# EAGLE board microzed_breakout_v0.7-default.78060e59 (EAGLE 7.7.0), part 1 of 2
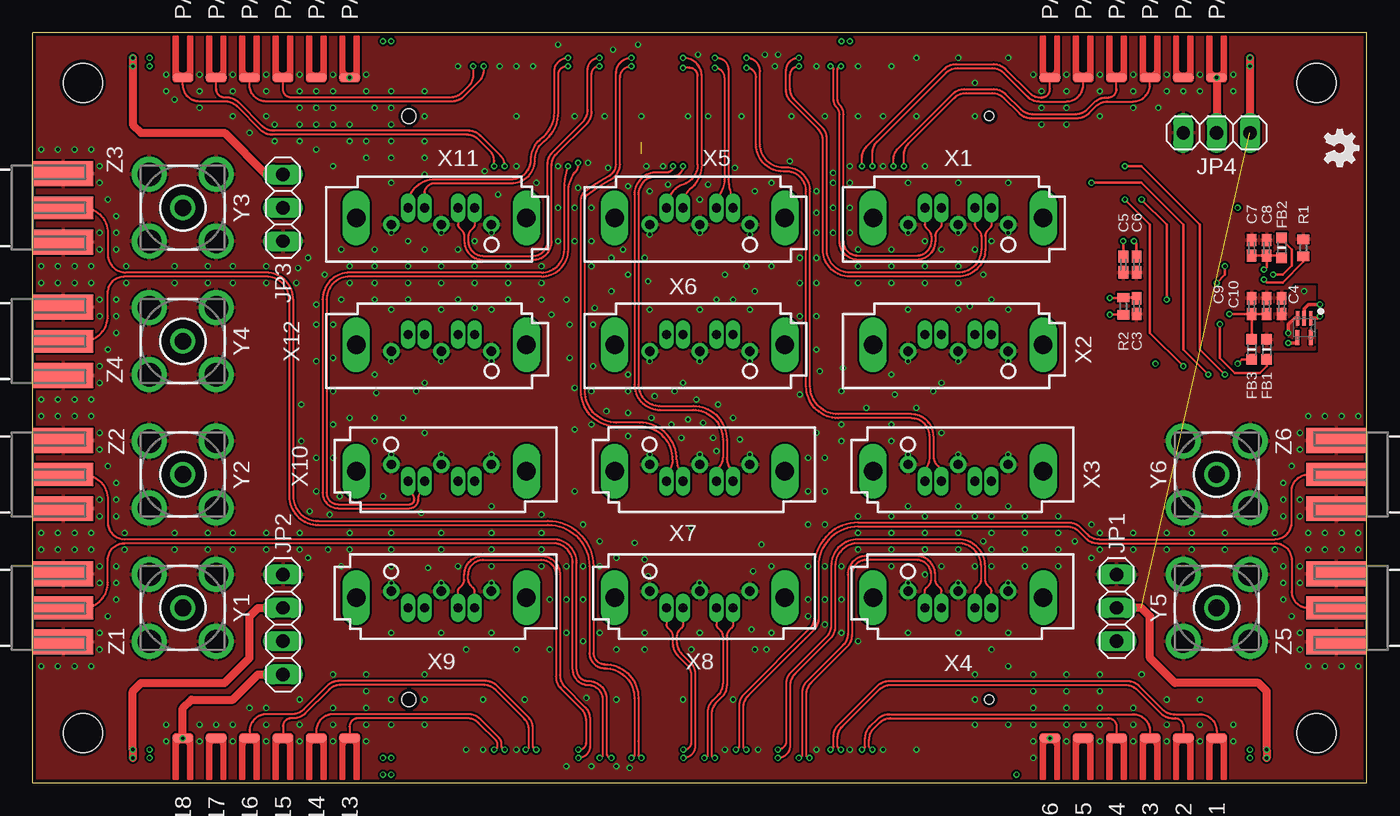
[diagram p0: board, top side]
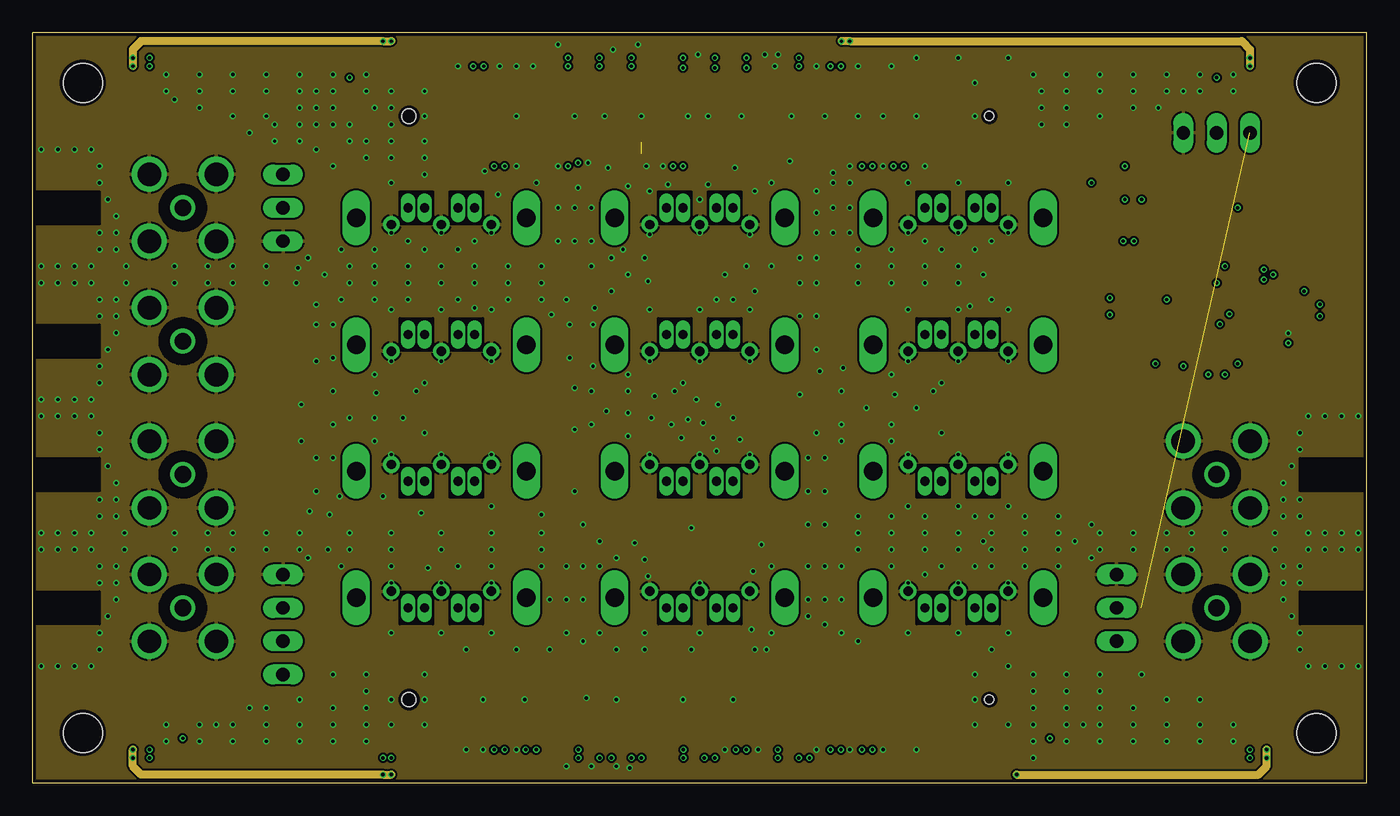
[diagram p1: board, inner layer Route2]
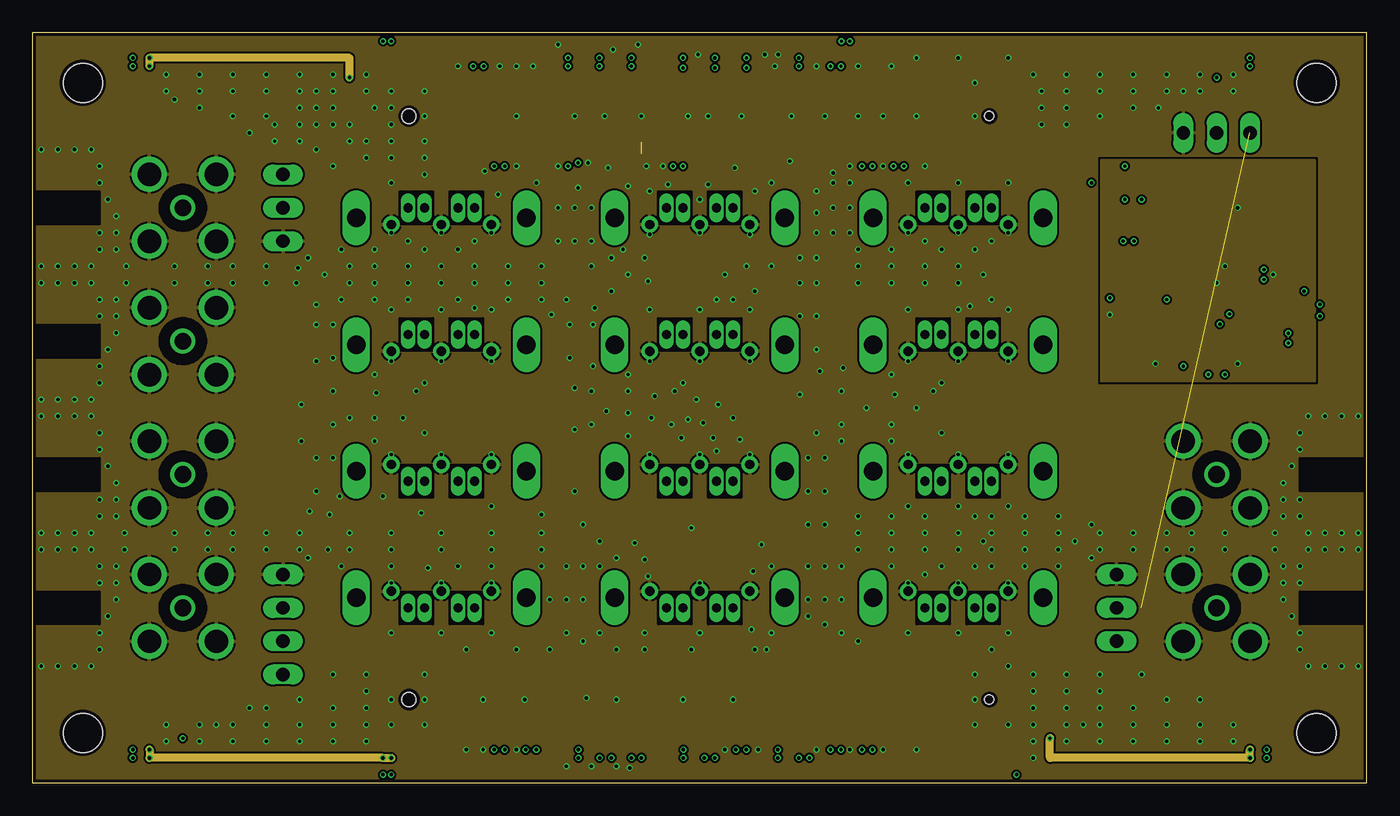
[diagram p2: board, inner layer Route15]
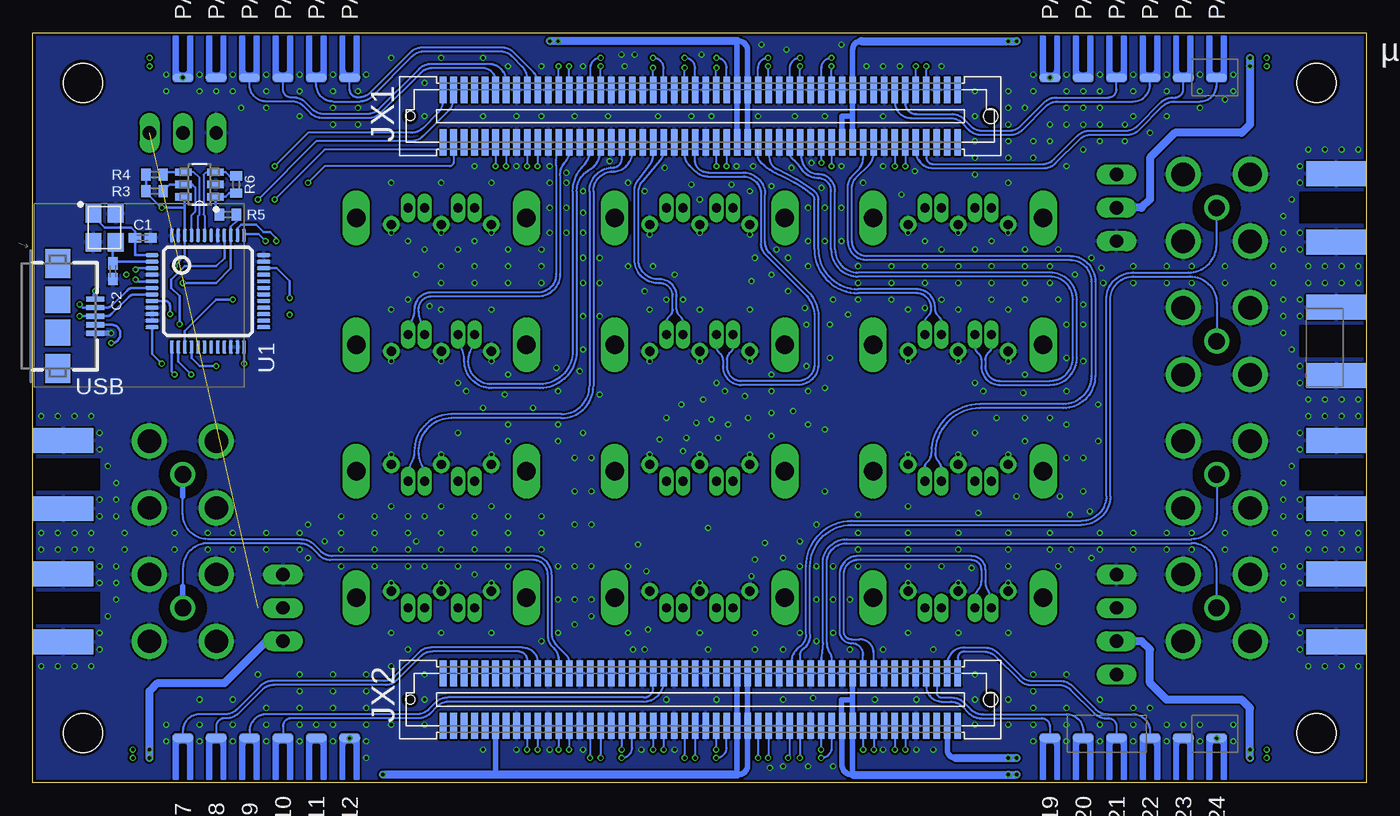
[diagram p3: board, bottom side, seen from below]

Size 101.6 x 57.15 mm. Coordinates in mm from the lower left corner, seen from the top.
Outline: 101.6,57.15 0,57.15 0,0 101.6,0 101.6,57.15
Copper layers (1*2*15*16): Top 0.035559375mm / dielectric 0.17018125mm / Route2 0.01778125mm / dielectric 47mil / Route15 0.01778125mm / dielectric 0.17018125mm / Bottom 0.035559375mm
Design rules "OSHPark-4layer-tuned *": minimum track width 5mil, minimum drill 10mil, track to track 5mil, track to pad 5mil, pad to pad 5mil, via to via 5mil, smd to smd 5mil, copper to edge 10mil, drill to drill 6mil, minimum pad ring 4mil, minimum via ring 4mil, stop-mask expansion 2mil, vias tented up to drill 15mil, thermal gap 6mil
Net classes: 0 default: width 0.152 mm, drill 0.254 mm, clearance 0.152 mm; 1 LVDS: width 0.152 mm, drill 0.254 mm, clearance 0.152 mm
tKeepout: area 95.3,50.8 to 100.3,55.8; area 95.3,1.3 to 100.3,6.3; area 1.3,1.3 to 6.3,6.3; area 1.3,50.8 to 6.3,55.8
bKeepout: area 95.3,50.8 to 100.3,55.8; area 95.3,1.3 to 100.3,6.3; area 1.3,1.3 to 6.3,6.3; area 1.3,50.8 to 6.3,55.8

## Footprints (pad centres in the part's own frame; a part is rotated, then mirrored left to right if it is on the bottom)
C0402K = smd 0.925 x 0.74: 1 -0.6,0; 2 0.6,0
_0603MP = smd 0.8 x 0.8: 1 -0.762,0; 2 0.762,0
1X03 = drill 1.016 long: 1 -2.54,0; 2 0,0; 3 2.54,0
1X04 = drill 1.016 long: 1 -3.81,0; 2 -1.27,0; 3 1.27,0; 4 3.81,0
1.6X3.8U-MM = smd 1.6 x 0.6: 1 0,-1.5
ABM8G = smd 1.4 x 1.2: 1 -1.1,-0.85; 2 1.1,-0.85; 3 1.1,0.85; 4 -1.1,0.85
R0402 = smd 0.7 x 0.9: 1 -0.65,0; 2 0.65,0
LQFP48 = smd 0.3 x 1: 1 -2.75,-4.25; 2 -2.25,-4.25; 3 -1.75,-4.25; 4 -1.25,-4.25; 5 -0.75,-4.25; 6 -0.25,-4.25; 7 0.25,-4.25; 8 0.75,-4.25; 9 1.25,-4.25; 10 1.75,-4.25; 11 2.25,-4.25; 12 2.75,-4.25; 25 2.75,4.25; 26 2.25,4.25; 27 1.75,4.25; 28 1.25,4.25; 29 0.75,4.25; 30 0.25,4.25; 31 -0.25,4.25; 32 -0.75,4.25; 33 -1.25,4.25; 34 -1.75,4.25; 35 -2.25,4.25; 36 -2.75,4.25 | smd 1 x 0.3: 13 4.25,-2.75; 14 4.25,-2.25; 15 4.25,-1.75; 16 4.25,-1.25; 17 4.25,-0.75; 18 4.25,-0.25; 19 4.25,0.25; 20 4.25,0.75; 21 4.25,1.25; 22 4.25,1.75; 23 4.25,2.25; 24 4.25,2.75; 37 -4.25,2.75; 38 -4.25,2.25; 39 -4.25,1.75; 40 -4.25,1.25; 41 -4.25,0.75; 42 -4.25,0.25; 43 -4.25,-0.25; 44 -4.25,-0.75; 45 -4.25,-1.25; 46 -4.25,-1.75; 47 -4.25,-2.25; 48 -4.25,-2.75
SOT95P280X145-6N = smd 1.27 x 0.559: 1 -1.219,0.94; 2 -1.219,0; 3 -1.219,-0.94; 4 1.219,-0.94; 5 1.219,0; 6 1.219,0.94
SOT50P160X60-5N = smd 1.118 x 0.254: 1 -0.737,0.508; 2 -0.737,0; 3 -0.737,-0.508 | smd 1.118 x 0.305: 4 0.737,-0.508; 5 0.737,0.508
USB-AB-MICRO-SMD = smd 1.4 x 0.4: D+ 2.85,0; D- 2.85,0.65; GND 2.85,-1.3; ID 2.85,-0.65; VBUS 2.85,1.3 | smd 1.9 x 2: P$6 0,1.25; P$7 0,-1.25 | smd 1.9 x 2.2: P$8 0,4; P$9 0,-4
SATA7-VERT = drill 0.7 pad 1.27: 1 3.81,-1.27; 4 0,-1.27; 7 -3.81,-1.27 | drill 0.7 pad 1.1 long: 2 2.54,0; 3 1.27,0; 5 -1.27,0; 6 -2.54,0 | drill 1.4 long: M1 -6.48,-0.77; M2 6.48,-0.77
BU-SMA-V = drill 1.27: 1 0,0 | drill 1.778: 2 -2.55,2.55; 3 2.55,2.55; 4 2.55,-2.55; 5 -2.55,-2.55
SMA_EDGE_2SIDE = smd 4.6 x 1.73: 1 -2.3,0 | smd 4.6 x 1.9 bottom: 2@1 -2.3,2.6; 2@2 -2.3,-2.6 | smd 4.6 x 1.9: 2@3 -2.3,-2.6; 2@4 -2.3,2.6
µZ = smd 0.5 x 2: 1 70.351,4.349; 2 70.351,8.349; 3 69.551,4.349; 4 69.551,8.349; 5 68.751,4.349; 6 68.751,8.349; 7 67.951,4.349; 8 67.951,8.349; 9 67.151,4.349; 10 67.151,8.349; 11 66.351,4.349; 12 66.351,8.349; 13 65.551,4.349; 14 65.551,8.349; 15 64.751,4.349; 16 64.751,8.349; 17 63.951,4.349; 18 63.951,8.349; 19 63.151,4.349; 20 63.151,8.349; 21 62.351,4.349; 22 62.351,8.349; 23 61.551,4.349; 24 61.551,8.349; 25 60.751,4.349; 26 60.751,8.349; 27 59.951,4.349; 28 59.951,8.349; 29 59.151,4.349; 30 59.151,8.349; 31 58.351,4.349; 32 58.351,8.349; 33 57.551,4.349; 34 57.551,8.349; 35 56.751,4.349; 36 56.751,8.349; 37 55.951,4.349; 38 55.951,8.349; 39 55.151,4.349; 40 55.151,8.349; 41 54.351,4.349; 42 54.351,8.349; 43 53.551,4.349; 44 53.551,8.349; 45 52.751,4.349; 46 52.751,8.349; 47 51.951,4.349; 48 51.951,8.349; 49 51.151,4.349; 50 51.151,8.349; 51 50.351,4.349; 52 50.351,8.349; 53 49.551,4.349; 54 49.551,8.349; 55 48.751,4.349; 56 48.751,8.349; 57 47.951,4.349; 58 47.951,8.349; 59 47.151,4.349; 60 47.151,8.349; 61 46.351,4.349; 62 46.351,8.349; 63 45.551,4.349; 64 45.551,8.349; 65 44.751,4.349; 66 44.751,8.349; 67 43.951,4.349; 68 43.951,8.349; 69 43.151,4.349; 70 43.151,8.349; 71 42.351,4.349; 72 42.351,8.349; 73 41.551,4.349; 74 41.551,8.349; 75 40.751,4.349; 76 40.751,8.349; 77 39.951,4.349; 78 39.951,8.349; 79 39.151,4.349; 80 39.151,8.349; 81 38.351,4.349; 82 38.351,8.349; 83 37.551,4.349; 84 37.551,8.349; 85 36.751,4.349; 86 36.751,8.349; 87 35.951,4.349; 88 35.951,8.349; 89 35.151,4.349; 90 35.151,8.349; 91 34.351,4.349; 92 34.351,8.349; 93 33.551,4.349; 94 33.551,8.349; 95 32.751,4.349; 96 32.751,8.349; 97 31.951,4.349; 98 31.951,8.349; 99 31.151,4.349; 100 31.151,8.349; 101 70.351,48.801; 102 70.351,52.801; 103 69.551,48.801; 104 69.551,52.801; 105 68.751,48.801; 106 68.751,52.801; 107 67.951,48.801; 108 67.951,52.801; 109 67.151,48.801; 110 67.151,52.801; 111 66.351,48.801; 112 66.351,52.801; 113 65.551,48.801; 114 65.551,52.801; 115 64.751,48.801; 116 64.751,52.801; 117 63.951,48.801; 118 63.951,52.801; 119 63.151,48.801; 120 63.151,52.801; 121 62.351,48.801; 122 62.351,52.801; 123 61.551,48.801; 124 61.551,52.801; 125 60.751,48.801; 126 60.751,52.801; 127 59.951,48.801; 128 59.951,52.801; 129 59.151,48.801; 130 59.151,52.801; 131 58.351,48.801; 132 58.351,52.801; 133 57.551,48.801; 134 57.551,52.801; 135 56.751,48.801; 136 56.751,52.801; 137 55.951,48.801; 138 55.951,52.801; 139 55.151,48.801; 140 55.151,52.801; 141 54.351,48.801; 142 54.351,52.801; 143 53.551,48.801; 144 53.551,52.801; 145 52.751,48.801; 146 52.751,52.801; 147 51.951,48.801; 148 51.951,52.801; 149 51.151,48.801; 150 51.151,52.801; 151 50.351,48.801; 152 50.351,52.801; 153 49.551,48.801; 154 49.551,52.801; 155 48.751,48.801; 156 48.751,52.801; 157 47.951,48.801; 158 47.951,52.801; 159 47.151,48.801; 160 47.151,52.801; 161 46.351,48.801; 162 46.351,52.801; 163 45.551,48.801; 164 45.551,52.801; 165 44.751,48.801; 166 44.751,52.801; 167 43.951,48.801; 168 43.951,52.801; 169 43.151,48.801; 170 43.151,52.801; 171 42.351,48.801; 172 42.351,52.801; 173 41.551,48.801; 174 41.551,52.801; 175 40.751,48.801; 176 40.751,52.801; 177 39.951,48.801; 178 39.951,52.801; 179 39.151,48.801; 180 39.151,52.801; 181 38.351,48.801; 182 38.351,52.801; 183 37.551,48.801; 184 37.551,52.801; 185 36.751,48.801; 186 36.751,52.801; 187 35.951,48.801; 188 35.951,52.801; 189 35.151,48.801; 190 35.151,52.801; 191 34.351,48.801; 192 34.351,52.801; 193 33.551,48.801; 194 33.551,52.801; 195 32.751,48.801; 196 32.751,52.801; 197 31.951,48.801; 198 31.951,52.801; 199 31.151,48.801; 200 31.151,52.801 | hole 3: 3.81,3.81; 3.81,53.34; 97.79,3.81; 97.79,53.34 | hole 1.1: 28.651,6.349; 28.651,50.801 | hole 0.7: 72.851,6.349; 72.851,50.801

## Placement (x,y rotation side)
C1  [C0402K]  93.22,41.53 0 bottom
C2  [C0402K]  95.5,38.99 270 bottom
C3  10n  [C0402K]  84.07,36.32 270 top
C4  100n  [C0402K]  95.12,36.32 90 top
C5  100n  [C0402K]  83.06,39.5 270 top
C6  100n  [C0402K]  84.07,39.5 270 top
C7  4µ7  [C0402K]  92.84,40.77 90 top
C8  100n  [C0402K]  93.98,40.77 90 top
C9  4µ7  [C0402K]  92.84,36.32 90 top
C10  100n  [C0402K]  93.98,36.32 90 top
FB1  600R  [_0603MP]  93.98,33.02 270 top
FB2  600R  [_0603MP]  95.12,40.77 270 top
FB3  600R  [_0603MP]  92.84,33.02 90 top
JP1  [1X03]  82.55,13.33 90 top
JP2  [1X04]  19.05,12.06 90 top
JP3  [1X03]  19.05,43.81 270 top
JP4  [1X03]  90.17,49.53 180 top
LOGO1  OSHW_LOGO_FILLX0100-NT  [OSHW_FILLX100_NOTEXT]  98.42,49.78 270 top
PAD1  [1.6X3.8U-MM]  90.17,1.9 180 top
PAD2  [1.6X3.8U-MM]  87.63,1.9 180 top
PAD3  [1.6X3.8U-MM]  85.09,1.9 180 top
PAD4  [1.6X3.8U-MM]  82.55,1.9 180 top
PAD5  [1.6X3.8U-MM]  80.01,1.9 180 top
PAD6  [1.6X3.8U-MM]  77.47,1.9 180 top
PAD7  [1.6X3.8U-MM]  90.17,1.9 180 bottom
PAD8  [1.6X3.8U-MM]  87.63,1.9 180 bottom
PAD9  [1.6X3.8U-MM]  85.09,1.9 180 bottom
PAD10  [1.6X3.8U-MM]  82.55,1.9 180 bottom
PAD11  [1.6X3.8U-MM]  80.01,1.9 180 bottom
PAD12  [1.6X3.8U-MM]  77.47,1.9 180 bottom
PAD13  [1.6X3.8U-MM]  24.13,1.9 180 top
PAD14  [1.6X3.8U-MM]  21.59,1.9 180 top
PAD15  [1.6X3.8U-MM]  19.05,1.9 180 top
PAD16  [1.6X3.8U-MM]  16.51,1.9 180 top
PAD17  [1.6X3.8U-MM]  13.97,1.9 180 top
PAD18  [1.6X3.8U-MM]  11.43,1.9 180 top
PAD19  [1.6X3.8U-MM]  24.13,1.9 180 bottom
PAD20  [1.6X3.8U-MM]  21.59,1.9 180 bottom
PAD21  [1.6X3.8U-MM]  19.05,1.9 180 bottom
PAD22  [1.6X3.8U-MM]  16.51,1.9 180 bottom
PAD23  [1.6X3.8U-MM]  13.97,1.9 180 bottom
PAD24  [1.6X3.8U-MM]  11.43,1.9 180 bottom
PAD25  [1.6X3.8U-MM]  11.43,55.25 0 top
PAD26  [1.6X3.8U-MM]  13.97,55.25 0 top
PAD27  [1.6X3.8U-MM]  16.51,55.25 0 top
PAD28  [1.6X3.8U-MM]  19.05,55.25 0 top
PAD29  [1.6X3.8U-MM]  21.59,55.25 0 top
PAD30  [1.6X3.8U-MM]  24.13,55.25 0 top
PAD31  [1.6X3.8U-MM]  11.43,55.25 0 bottom
PAD32  [1.6X3.8U-MM]  13.97,55.25 0 bottom
PAD33  [1.6X3.8U-MM]  16.51,55.25 0 bottom
PAD34  [1.6X3.8U-MM]  19.05,55.25 0 bottom
PAD35  [1.6X3.8U-MM]  21.59,55.25 0 bottom
PAD36  [1.6X3.8U-MM]  24.13,55.25 0 bottom
PAD37  [1.6X3.8U-MM]  77.47,55.25 0 top
PAD38  [1.6X3.8U-MM]  80.01,55.25 0 top
PAD39  [1.6X3.8U-MM]  82.55,55.25 0 top
PAD40  [1.6X3.8U-MM]  85.09,55.25 0 top
PAD41  [1.6X3.8U-MM]  87.63,55.25 0 top
PAD42  [1.6X3.8U-MM]  90.17,55.25 0 top
PAD43  [1.6X3.8U-MM]  77.47,55.25 0 bottom
PAD44  [1.6X3.8U-MM]  80.01,55.25 0 bottom
PAD45  [1.6X3.8U-MM]  82.55,55.25 0 bottom
PAD46  [1.6X3.8U-MM]  85.09,55.25 0 bottom
PAD47  [1.6X3.8U-MM]  87.63,55.25 0 bottom
PAD48  [1.6X3.8U-MM]  90.17,55.25 0 bottom
Q1  SMD-4P-2G-3.2X2.5  [ABM8G]  96.14,42.29 270 bottom
R1  12k  [R0402]  96.77,40.77 270 top
R2  10k  [R0402]  83.06,36.32 270 top
R3  10k  [R0402]  92.33,45.09 180 bottom
R4  10k  [R0402]  92.33,46.36 180 bottom
R5  10k  [R0402]  86.74,43.31 0 bottom
R6  2k  [R0402]  86.11,45.59 90 bottom
U1  FT232H  [LQFP48]  88.27,37.47 270 bottom
U2  93LC46BT-I/OT  [SOT95P280X145-6N]  88.9,45.59 180 bottom
U3  TPD3E001DRLR  [SOT50P160X60-5N]  96.84,34.67 270 top
USB  [USB-AB-MICRO-SMD]  99.69,35.56 0 bottom
X1  47155-4001  [SATA7-VERT]  70.48,43.81 0 top
X2  47155-4001  [SATA7-VERT]  70.48,34.16 0 top
X3  47155-4001  [SATA7-VERT]  70.48,22.99 180 top
X4  47155-4001  [SATA7-VERT]  70.48,13.33 180 top
X5  47155-4001  [SATA7-VERT]  50.8,43.81 0 top
X6  47155-4001  [SATA7-VERT]  50.8,34.16 0 top
X7  47155-4001  [SATA7-VERT]  50.8,22.99 180 top
X8  47155-4001  [SATA7-VERT]  50.8,13.33 180 top
X9  47155-4001  [SATA7-VERT]  31.11,13.33 180 top
X10  47155-4001  [SATA7-VERT]  31.11,22.99 180 top
X11  47155-4001  [SATA7-VERT]  31.11,43.81 0 top
X12  47155-4001  [SATA7-VERT]  31.11,34.16 0 top
Y1  BU-SMA-V  [BU-SMA-V]  11.43,13.33 180 top
Y2  BU-SMA-V  [BU-SMA-V]  11.43,23.49 180 top
Y3  BU-SMA-V  [BU-SMA-V]  11.43,43.81 180 top
Y4  BU-SMA-V  [BU-SMA-V]  11.43,33.66 180 top
Y5  BU-SMA-V  [BU-SMA-V]  90.17,13.33 180 top
Y6  BU-SMA-V  [BU-SMA-V]  90.17,23.49 180 top
Z1  BU-SMA-E-2SIDE  [SMA_EDGE_2SIDE]  0,13.33 180 top
Z2  BU-SMA-E-2SIDE  [SMA_EDGE_2SIDE]  0,23.49 180 top
Z3  BU-SMA-E-2SIDE  [SMA_EDGE_2SIDE]  0,43.81 180 top
Z4  BU-SMA-E-2SIDE  [SMA_EDGE_2SIDE]  0,33.66 180 top
Z5  BU-SMA-E-2SIDE  [SMA_EDGE_2SIDE]  101.6,13.33 0 top
Z6  BU-SMA-E-2SIDE  [SMA_EDGE_2SIDE]  101.6,23.49 0 top
ZED1  µZ-FCI""  [µZ]  0,57.15 180 bottom

## Library data of the parts
C1-C10 R1-R6 = rcl
FB1-FB3 = microbuilder
JP1-JP4 = pinhead-2
LOGO1 = ohw-logo
PAD1-PAD48 = smd_pads
Q1 = xtal
U1 = ft232h
U2 = 93lc46; MPN: 93LC46BT-I/OT; OC_FARNELL: 1556164; OC_NEWARK: 75M3689; PACKAGE: SOT-6; SUPPLIER: Microchip
U3 = esd; MPN: TPD3E001DRLR; OC_FARNELL: 1603422; OC_NEWARK: 41M5842; PACKAGE: SOT-5; SUPPLIER: Texas Instruments
USB = SparkFun-Connectors
X1-X12 = sata
Y1-Y6 = sma; OC_FARNELL: unknown; OC_NEWARK: unknown
Z1-Z6 = sma
ZED1 = microzed

## Nets
BANK13_00_N [LVDS]: PAD34.1 ZED1.89
BANK13_00_P [LVDS]: PAD33.1 ZED1.87
BANK13_01_N [LVDS]: PAD25.1 ZED1.90
BANK13_01_P [LVDS]: PAD26.1 ZED1.88
BANK13_02_N [LVDS]: PAD28.1 ZED1.93
BANK13_02_P [LVDS]: PAD27.1 ZED1.91
BANK13_03_N [LVDS]: PAD32.1 ZED1.94
BANK13_03_P [LVDS]: PAD31.1 ZED1.92
BANK13_04_N [LVDS]: PAD20.1 ZED1.195
BANK13_04_P [LVDS]: PAD19.1 ZED1.193
BANK13_06_N [LVDS]: PAD21.1 ZED1.199
BANK13_06_P [LVDS]: PAD22.1 ZED1.197
EE_CLK1: R4.1 U1.44 U2.4
EE_CS1: R3.1 U1.45 U2.5
EE_DATA1: R6.2 U1.43 U2.3
FPGA_VBAT: ZED1.7
FTDI_D+: U1.7 U3.1 USB.D+
FTDI_D-: U1.6 U3.2 USB.D-
FTDI_TCK: U1.13 ZED1.1
FTDI_TDI: U1.14 ZED1.4
FTDI_TDO: U1.15 ZED1.3
FTDI_TMS: U1.16 ZED1.2
GND: C1.2 C2.2 C3.2 C4.2 C5.2 C6.2 C7.2 C8.2 C9.2 C10.2 JP1.3 JP2.4 JP3.3 JP4.3 PAD5.1 PAD11.1 PAD17.1 PAD23.1 PAD29.1 PAD35.1 PAD41.1 PAD47.1 Q1.2 Q1.4 R1.1 U1.4 U1.9 U1.10 U1.11 U1.22 U1.23 U1.35 U1.36 U1.41 U1.47 U1.48 U2.2 U3.3 USB.GND X1.1 X1.4 X1.7 X2.1 X2.4 X2.7 X3.1 X3.4 X3.7 X4.1 X4.4 X4.7 X5.1 X5.4 X5.7 X6.1 X6.4 X6.7 X7.1 X7.4 X7.7 X8.1 X8.4 X8.7 X9.1 X9.4 X9.7 X10.1 X10.4 X10.7 X11.1 X11.4 X11.7 X12.1 X12.4 X12.7 Y1.2 Y1.3 Y1.4 Y1.5 Y2.2 Y2.3 Y2.4 Y2.5 Y3.2 Y3.3 Y3.4 Y3.5 Y4.2 Y4.3 Y4.4 Y4.5 Y5.2 Y5.3 Y5.4 Y5.5 Y6.2 Y6.3 Y6.4 Y6.5 Z1.2@1 Z1.2@2 Z1.2@3 Z1.2@4 Z2.2@1 Z2.2@2 Z2.2@3 Z2.2@4 Z3.2@1 Z3.2@2 Z3.2@3 Z3.2@4 Z4.2@1 Z4.2@2 Z4.2@3 Z4.2@4 Z5.2@1 Z5.2@2 Z5.2@3 Z5.2@4 Z6.2@1 Z6.2@2 Z6.2@3 Z6.2@4 ZED1.15 ZED1.16 ZED1.21 ZED1.22 ZED1.27 ZED1.28 ZED1.33 ZED1.34 ZED1.39 ZED1.40 ZED1.45 ZED1.46 ZED1.51 ZED1.52 ZED1.65 ZED1.66 ZED1.71 ZED1.72 ZED1.77 ZED1.85 ZED1.86 ZED1.95 ZED1.96 ZED1.115 ZED1.116 ZED1.121 ZED1.122 ZED1.127 ZED1.128 ZED1.133 ZED1.134 ZED1.139 ZED1.140 ZED1.145 ZED1.146 ZED1.151 ZED1.152 ZED1.165 ZED1.166 ZED1.171 ZED1.172 ZED1.177 ZED1.185 ZED1.186 ZED1.191 ZED1.192
JX1_00_N [LVDS]: PAD45.1 ZED1.13
JX1_00_P [LVDS]: PAD46.1 ZED1.11
JX1_01_N [LVDS]: PAD39.1 ZED1.14
JX1_01_P [LVDS]: PAD40.1 ZED1.12
JX1_02_N [LVDS]: PAD43.1 ZED1.19
JX1_02_P [LVDS]: PAD44.1 ZED1.17
JX1_03_N [LVDS]: PAD37.1 ZED1.20
JX1_03_P [LVDS]: PAD38.1 ZED1.18
JX1_04_N [LVDS]: X1.5 ZED1.25
JX1_04_P [LVDS]: X1.6 ZED1.23
JX1_05_N: X2.3 ZED1.26
JX1_05_P: X2.2 ZED1.24
JX1_06_N [LVDS]: X1.3 ZED1.31
JX1_06_P [LVDS]: X1.2 ZED1.29
JX1_07_N: X2.5 ZED1.32
JX1_07_P: X2.6 ZED1.30
JX1_09_N: X3.5 ZED1.38
JX1_09_P: X3.6 ZED1.36
JX1_10_N: X3.3 ZED1.43
JX1_10_P: X3.2 ZED1.41
JX1_11_N [LVDS]: X6.3 ZED1.44
JX1_11_P [LVDS]: X6.2 ZED1.42
JX1_12_N: X5.2 ZED1.49
JX1_12_P: X5.3 ZED1.47
JX1_13_N [LVDS]: X6.5 ZED1.50
JX1_13_P [LVDS]: X6.6 ZED1.48
JX1_14_N: X5.5 ZED1.55
JX1_14_P: X5.6 ZED1.53
JX1_15_N: X7.5 ZED1.56
JX1_15_P: X7.6 ZED1.54
JX1_16_N: X7.3 ZED1.63
JX1_16_P: X7.2 ZED1.61
JX1_17_N [LVDS]: X12.3 ZED1.64
JX1_17_P [LVDS]: X12.2 ZED1.62
JX1_18_N [LVDS]: X11.3 ZED1.69
JX1_18_P [LVDS]: X11.2 ZED1.67
JX1_19_N [LVDS]: X12.5 ZED1.70
JX1_19_P [LVDS]: X12.6 ZED1.68
JX1_20_N: X11.5 ZED1.75
JX1_20_P: X11.6 ZED1.73
JX1_21_N: X10.3 ZED1.76
JX1_21_P: X10.2 ZED1.74
JX1_23_N [LVDS]: X10.5 ZED1.84
JX1_23_P [LVDS]: X10.6 ZED1.82
JX2_00_N [LVDS]: PAD7.1 ZED1.119
JX2_00_P [LVDS]: PAD8.1 ZED1.117
JX2_01_N [LVDS]: PAD3.1 ZED1.120
JX2_01_P [LVDS]: PAD4.1 ZED1.118
JX2_02_N [LVDS]: Y6.1 ZED1.125
JX2_02_P [LVDS]: Y5.1 ZED1.123
JX2_03_N [LVDS]: PAD1.1 ZED1.126
JX2_03_P [LVDS]: PAD2.1 ZED1.124
JX2_05_N [LVDS]: X4.3 ZED1.132
JX2_05_P [LVDS]: X4.2 ZED1.130
JX2_07_N [LVDS]: X4.5 ZED1.138
JX2_07_P [LVDS]: X4.6 ZED1.136
JX2_08_N [LVDS]: PAD10.1 ZED1.143
JX2_08_P [LVDS]: PAD9.1 ZED1.141
JX2_09_N [LVDS]: Z6.1 ZED1.144
JX2_09_P [LVDS]: Z5.1 ZED1.142
JX2_11_N [LVDS]: X8.5 ZED1.150
JX2_11_P [LVDS]: X8.6 ZED1.148
JX2_13_N [LVDS]: X8.3 ZED1.156
JX2_13_P [LVDS]: X8.2 ZED1.154
JX2_15_N: Z4.1 ZED1.164
JX2_15_P: Z3.1 ZED1.162
JX2_16_N: Y4.1 ZED1.169
JX2_16_P: Y3.1 ZED1.167
JX2_17_N: Z1.1 ZED1.170
JX2_17_P: Z2.1 ZED1.168
JX2_18_N: Y1.1 ZED1.175
JX2_18_P: Y2.1 ZED1.173
JX2_19_N [LVDS]: X9.5 ZED1.176
JX2_19_P [LVDS]: X9.6 ZED1.174
JX2_20_N: X9.3 ZED1.183
JX2_20_P: X9.2 ZED1.181
JX2_21_N [LVDS]: PAD15.1 ZED1.184
JX2_21_P [LVDS]: PAD16.1 ZED1.182
JX2_23_N [LVDS]: PAD13.1 ZED1.190
JX2_23_P [LVDS]: PAD14.1 ZED1.188
N$1: ZED1.187
N$3: ZED1.189
N$177: R5.1 R6.1 U2.1
N$178: C1.1 Q1.1 U1.1
N$179: C2.1 Q1.3 U1.2
N$180: C3.1 R2.1 U1.34
N$181: R1.2 U1.5
N$182: U3.4 USB.ID
PMOD_A_VCC [LVDS]: JP1.1 PAD6.1 PAD12.1
PMOD_B_VCC [LVDS]: JP2.1 PAD18.1 PAD24.1
PMOD_C_VCC [LVDS]: JP3.2 PAD30.1 PAD36.1
PMOD_D_VCC [LVDS]: JP4.2 PAD42.1 PAD48.1
VBUS: C4.1 FB1.1 U3.5 USB.VBUS
VCCA: C6.1 U1.37
VCCD: FB2.1 FB3.1 R2.2 R3.2 R4.2 R5.2 U1.12 U1.24 U1.39 U1.46 U2.6
VCCO_13 [LVDS]: JP2.2 ZED1.198
VCCO_34: JP3.1 ZED1.78 ZED1.79 ZED1.80
VCCO_35: JP2.3 ZED1.178 ZED1.179 ZED1.180
VCORE: C5.1 U1.38
VIN_HDR [LVDS]: JP1.2 JP4.1 ZED1.57 ZED1.58 ZED1.59 ZED1.60 ZED1.112 ZED1.157 ZED1.158 ZED1.159 ZED1.160
VPHY: C7.1 C8.1 FB2.2 U1.3
VPLL: C9.1 C10.1 FB3.2 U1.8
VREGIN: FB1.2 U1.40